# Altium PCB PCB1.PcbDoc (part 2 of 2)
Units mil, origin at the board's own origin, x right, y up, seen from the top; angles counter-clockwise.
Board outline 2720 x 1000 mil, 4 copper layers (L1, L2, L3, L4), stack 61.583 mil thick; 64 components, 73 nets, 298 pads, 153 vias.
Unrouted connection lines stored in the file: 1.
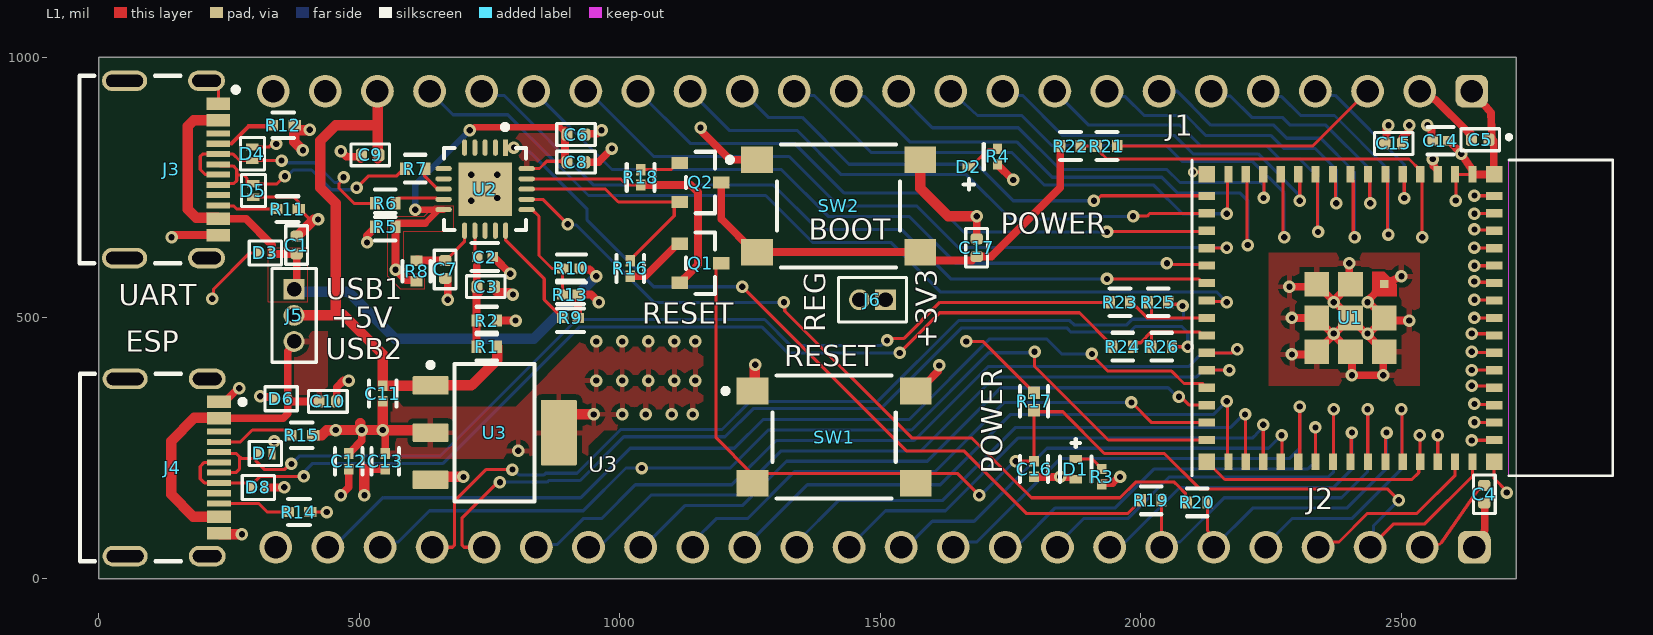
[diagram p0: L1 view]

## Via types
v1: diameter 24, hole 12, L1 to L4, tented both sides, 149 vias
v2: diameter 24, hole 12, L1 to L4, tented top, 3 vias
v3: diameter 20, hole 12, L1 to L4, tented both sides, 1 vias

## Nets (pads, with @x,y where several pads share a name; then routed paths per layer and width w, separated by ;. In a path a pad name is that pad's centre, name@x,y a point inside that pad or via, vN(x,y) a via of type N, cw(c..) or ccw(c..) an arc to the next point about the centre after c; other vN are vias at no path point) (continued)
GPIO_18: (continued)
  L4 w6: J1.21 680,890 785,890 825,850 835,840 940,735 1280,735 1370,645 1520,645 1615,550 2145,550 v1(2165,530)
GPIO_21: J2.19 U1.25 | length 1563.6
  L1 w6: U1.25 2174.32,433.11 2181.21,440 v1(2185,440)
  L4 w6: J2.19 845.38,65.38 880.38,65.38 930,115 965,115 1030,180 1215,180 1300,265 1565,265 1707,407 2092,407 2118.11,433.11 2174.32,433.11 2181.21,440 v1(2185,440)
GPIO_26: J2.18 U1.26 | length 1414.3
  L1 w6: U1.26 2126.83,399.82 2169.82,399.82 v1(2170,400)
  L4 w6: J2.18 950.14,70.14 970.14,70.14 1060,160 1225,160 1310,245 1578.01,245 1720.01,387 2107,387 2120,400 v1(2170,400)
GPIO_33: J2.17 U1.28 | length 1227.2
  L1 w6: v1(2073,349) 2076.79,349 2093.07,332.72 U1.28
  L4 w6: J2.17 1045,60 1125,140 1235,140 1320,225 1590,225 1731,366 2052.21,366 2069.21,349 v1(2073,349)
GPIO_34: J2.16 U1.29 | length 1123.7
  L1 w6: v1(1982,338) 2020.75,299.25 U1.29
  L4 w6: J2.16 1140,70 1185,115 1245,115 1335,205 1605,205 1738,338 v1(1982,338)
GPIO_35: J2.15 U1.31 | length 1152.1
  L1 w6: v1(2165,340) 2166.5,338.5 2166.5,230.84 U1.31@2167.46,229.88
  L4 w6: J2.15 1360,180 1615,180 1750,315 2140,315 v1(2165,340)
GPIO_36: J2.14 U1.32 | length 1062.6
  L1 w6: v1(2200,315) 2200.73,314.27 2200.73,225.18 U1.32
  L4 w6: J2.14 1340,70 1420,150 1620,150 1760,290 2172.14,290 2197.14,315 v1(2200,315)
GPIO_37: J2.13 U1.33 | length 957.3
  L1 w6: v1(2235,295) v1(2235,295) 2234.96,235.2 2235.71,234.45 U1.33@2237.03,234.45
  L4 w6: J2.13 1510,130 1625,130 1765,270 2214.75,270 2221.82,277.07 2221.82,278.03 2235,291.21 v1(2235,295)
GPIO_38: J2.12 U1.34 | length 868.5
  L1 w6: U1.34@2271.1,224.45 v1@2271.1,273.9
  L4 w6: J2.12 1550,60 1600,110 1680,110 1820,250 2245,250 v1(2270,275)
GPIO_39: J2.11 U1.35 | length 930.6
  L1 w6: U1.35 2304.72,227.32 2304.72,240.78 2305,241.05 v1(2305,330)
  L4 w6: J2.11 1650.14,70.14 1685.14,70.14 1845,230 2285,230 2305,250 v1(2305,330)
GPIO_40: J2.10 U1.36 | length 787.9
  L1 w6: U1.36@2335,230.55 2335.16,230.71 2335.16,289.84 v1(2335,290)
  L4 w6: J2.10 1750.14,70.14 1770.14,70.14 1835,135 1950,135 2025,210 2320,210 2335,225 v1(2335,290)
GPIO_41: J2.9 U1.37 | length 807
  L1 w6: U1.37@2370,231.46 2369.39,232.07 2369.39,324.39 v1(2370,325)
  L4 w6: J2.9 1840,65 1890,115 1975,115 2055,195 2360,195 2370,205 v1(2370,325)
GPIO_42: J2.8 U1.38 | length 651.7
  L1 w6: U1.38@2403.62,225.97 2403.62,278.62 v1(2405,280)
  L4 w6: J2.8 1950.14,70.14 1970.14,70.14 2075,175 2370,175 2405,210 v1(2405,280)
GPIO_45: J2.5 U1.41 | length 541.7
  L1 w6: v1(2500,325) 2501.32,323.68 2501.32,225.77 U1.41
  L4 w6: J2.5 2240,65 2290,115 2405,115 2500,210 v1(2500,325)
GPIO_46: J2.4 U1.44 | length 346.6
  L1 w6: J2.4 2350.14,70.14 2380.14,70.14 2435,125 2530,125 2603.03,198.03 U1.44
GPIO_47: J2.23 U1.27 | length 1889.6
  L1 w6: v1(1906,431) 1906,429 1937,398 2059,398 2082.86,374.14 2118.7,374.14 U1.27
  L4 w6: J2.23 450,60 545,155 ; 547.81,155 925,155 1020,250 1220,250 1275,305 1555,305 1710,460 1819,460 1848,431 v1(1906,431)
GPIO_48: J2.22 U1.30 | length 1828.3
  L1 w6: v2(1796,435) 1796,407.36 1937.57,265.79 U1.30
  L4 w6: J2.22 550.14,70.14 575.14,70.14 635,130 930,130 1012,212 v1(1042,212) 1212,212 1285,285 1560,285 1708.32,433.32 1794.32,433.32 v2(1796,435)
NetD1_1: D1.1 R3.1 | length 58.7
  L1 w6: D1.1 1906.48,229.5 1925,210.98 R3.1
NetD2_1: D2.1 R4.1 | length 70.5
  L1 w6: D2.1@1679,789 1674,790 1707,823 1723.24,823 R4.1
NetJ3_A5: J3.A5 R12.2 | length 122.8
  L1 w6: J3.A5 230.75,835.12 254.95,835.12
  L1 w8: 254.95,835.12 287.6,867.77 R12.2@338.7,867.77
NetJ3_B5: J3.B5 R11.2 | length 113.9
  L1 w6: J3.B5 230.75,715.2 258.8,715.2 265,709 R11.2
NetJ4_A5: J4.A5 R15.2 | length 150.9
  L1 w6: J4.A5 272.21,262.21 295,285 356.38,285 366.38,275 R15.2
NetJ4_B5: J4.B5 R14.2 | length 138.6
  L1 w6: J4.B5 307.2,144.1 323.65,127.66 R14.2
NetQ1_1: Q1.1 R16.1 | length 121.2
  L1 w15: R16.1 1020.19,580 1048.9,580 1111.3,642.4 Q1.1
NetQ2_1: Q2.1 R18.1 | length 80.5
  L1 w6: R18.1 1098.71,784.81 1111.3,797.4 Q2.1
NetR9_2: R9.2 U2.15 | length 224.6
  L1 w6: U2.15 781,649 785,645 855,575 855,535.19 887.53,502.66 889.17,501.02 R9.2@889.17,499.3 ; R9.2@884.17,499.3 R9.2@885.81,497.66 ; R9.2@890.19,495 R9.2@888.47,495 ; R9.2@885.81,497.66 R9.2@888.47,495 ; R9.2@885.81,497.66 R9.2@888.47,495
"RTS  FTDI": Q1.2 R18.2 U2.19 | length 518.6
  L1 w6: U2.19@832.1,766.88 832.37,766.61 835,766.61 1001.9,766.61 1013.32,755.19 R18.2
  L1 w15: R18.2@1040.15,755.04 1136.17,755.04 1150,741.21 1150,602.36 1123.48,575.85 1123.48,571.91 1119.17,567.6 Q1.2
"RXD FTDI": R19.2 U2.1 | length 1531.3
  L1 w6: U2.1@781.08,827 v1(797,827) ; v1(1235,560) 1550,245 1660,245 1780,125 1975.32,125 1993.5,143.19 1995.47,143.19 1998.5,146.22 R19.2@1998.5,148.19
  L4 w6: v1(797,827) 799.68,824.32 820.68,824.32 829,816 830,816 937.34,708.66 937.34,687.66 1065,560 v1(1235,560)
"TXD FTDI": R20.2 U2.17 | length 1531.2
  L1 w6: U2.17@832.1,727.51 852.49,727.51 v1(900,680) ; v1(1315,530) 1316.59,528.41 1316.59,513.41 1560,270 1675,270 1790,155 1960,155 1990,185 2064.14,185 2071.33,177.81 2085.47,163.67 2085.47,159.84 R20.2@2090.32,155
  L4 w6: v1(900,680) 901.59,678.41 916.59,678.41 1065,530 v1(1315,530)
UORXD: J2.6 R20.1 U1.40 | length 610.8
  L1 w6: R20.1 2127.69,92.35 2129.86,90.18 2129.86,70.14 J2.6 ; U1.40 2469.17,277.61 v1(2471.57,280)
  L4 w6: J2.6 2140,60.62 2214.38,135 2395,135 2471.57,211.57 v1(2471.57,280)
UOTXD: J2.7 R19.1 U1.39 | length 767.6
  L1 w6: R19.1 2039.84,149.84 2039.84,60.16 J2.7 ; U1.39@2435,222.9 2435.35,223.25 2435.35,324.65 v1(2435,325)
  L4 w6: J2.7 2050.14,70.14 2075.14,70.14 2160,155 2385,155 2435,205 v1(2435,325)
"VBUS_ SENSE": R10.1 R13.2 U2.16 | length 209.7
  L1 w6: U2.16 832.02,707.91 845,694.93 845,620 870,595 R10.1 ; R13.2 R10.1
pads on no net: J1.24 J2.24 J3.A8 J3.B8 J4.A8 J4.B8 U2.2 U2.3 U2.4 U2.5 U2.6 U2.7 U2.13 U2.14

## Polygon pours and split planes (outlines as drawn)
"+3V3  FTDI" on L1 "+3V3__FTDI_L01_P002" (solid, pour order 2): 645,715 680,715 680,665 585,665 585,595 595,585 625,585 625,555 580,555 555,580 555,595 555,690 560,695 625,695
"+3V3  FTDI" on L1 "+3V3__FTDI_L01_P006" (solid, pour order 6): 800,780 920,780 910,790 910,880 685,880 685,853.22 790.42,847.04
GND on L1 "GND_L01_P007" (solid, pour order 7): 945,475 1160,475 1160,285 970,285 940,255 940,230 920,210 845,210 825,230 430,230 395,265 395,295 405,295 425,315 490,315 525,350 565,350 585,330 800,330
+5V_VBUS1 on L1 "+5V_VBUS1_L01_P005" (solid, pour order 5): 325,635 400,635 400,530 325,530
GND on L1 "GND_L01_P003" (solid, pour order 3): 2245,625 2535,625 2535,370 2445,370 2245,370
+5V_VBUS2 on L1 "+5V_VBUS2_L01_P001" (solid, pour order 1): 440,475 440,325 350,325 350,475
GND on L2 "GND_L02_P013" (solid, pour order 13): 2720,1000 2720,0 0,0 0,1000
+3V3_REG on L2 "+3V3_REG_L02_P012" (solid, pour order 12): 415,145 690,145 720,175 720,210 440,210 420,190 440,210 415,185
+3V3 on L2 "+3V3_L02_P008" (solid, pour order 8): 2640,20 2690,20 2690,105 2575,220 2575,980 2505,980 2500,985 2485,970 2485,915 2480,915 2420,855 1740,855 1547.5,662.5 1545,665 480,665 480,620 485,615 630,615 780,475 800,475 1300,475 1400,575 1490,575 1490,505 1535,505 1910,130 2535,130 2535,125
GND on L3 (split plane): 2699.9,20.1 20.1,20.1 20.1,979.9 2699.9,979.9

## Silkscreen, mask and mechanical layers (free items; w line width, h text height)
Top Overlay:
  text "POWER" at 1731,661.87 h40
  text "BOOT" at 1363,650 h40
  text "USB1" at 436,536 h40
  text "UART" at 39,524 h40
  text "RESET" at 1043.54,489 h40
  text "+5V" at 446,481 h40
  text "REG" at 1394,473 h40 r90
  text "+3V3" at 1608.12,441 h40 r90
  text "ESP" at 52,435 h40
  text "USB2" at 436,421 h40
  text "RESET" at 1315.76,407.74 h40
  text "POWER" at 1734,201.1 h40 r90
  text "RESET" at -6705.24,-344.26 h40
Bottom Overlay:
  text "+5V" at 496.35,787.65 h20 r270
  text "GND" at 2609.35,787.65 h20 r270
  text "GND" at 381.35,783.65 h20 r270
  text "+3V3" at 2479.35,767.65 h20 r270
  text "GPIO1" at 2296.35,757.66 h20 r270
  text "GPIO_9" at 1502.69,731 h20 r270
  text "GPIO_8" at 1602.69,731 h20 r270
  text "GPIO_7" at 1750.69,731 h20 r270
  text "GPIO_6" at 1812.69,731 h20 r270
  text "GPIO_5" at 1912.83,731 h20 r270
  text "GPIO_4" at 2007.69,731 h20 r270
  text "GPIO_3" at 2112.69,731 h20 r270
  text "GPIO_2" at 2217.54,731 h20 r270
  text "GPIO_11" at 1292.69,721 h20 r270
  text "GPIO_18" at 613.69,714.34 h20 r270
  text "GPIO_16" at 797.69,714.34 h20 r270
  text "GPIO_15" at 887.69,714.34 h20 r270
  text "GPIO_14" at 1002.69,714.34 h20 r270
  text "GPIO_13" at 1102.69,714.34 h20 r270
  text "GPIO_12" at 1203.69,714.34 h20 r270
  text "GPIO_10" at 1392.69,714.34 h20 r270
  text "CON GPIO_0" at 2388.69,651.03 h20 r270
  text "BCB_DESIGN" at 1374,581.99 h90
  text "ESP_USB_N" at 654.33,320.5 h20 r270
  text "ESP_USB_P" at 737.33,320.5 h20 r270
  text "GPIO47" at 452.59,147.22 h20 r270
  text "GPIO_48" at 534.33,147.22 h20 r270
  text "GPIO_21" at 822.33,147.22 h20 r270
  text "GPIO_26" at 901.33,147.22 h20 r270
  text "GPIO_33" at 998.33,147.22 h20 r270
  text "GPIO_34" at 1111.18,147.22 h20 r270
  text "GPIO_35" at 1220.76,147.22 h20 r270
  text "GPIO_36" at 1316.33,147.22 h20 r270
  text "GPIO_37" at 1424.93,147.22 h20 r270
  text "GPIO_38" at 1517.43,147.22 h20 r270
  text "GPIO_39" at 1597.43,147.22 h20 r270
  text "GPIO_40" at 1697.43,147.22 h20 r270
  text "GPIO_41" at 1793.33,147.22 h20 r270
  text "GPIO_42" at 1902.33,147.22 h20 r270
  text "UPTXD" at 2018,147.22 h20 r270
  text "UORXD" at 2128.09,147.22 h20 r270
  text "GPIO_45" at 2200.43,147.22 h20 r270
  text "GPIO_46" at 2314.33,147.22 h20 r270
  text "CHIP_PU" at 2420.33,147.22 h20 r270
  text "GND" at 2516,147.22 h20 r270
  text "+3V3" at 2620,147.22 h20 r270
Board Shape:
  lines w20: 0,0 0,1000 2720,1000 2720,0 20,0